# Altium PCB samll car.PcbDoc
Units mil, origin at the board's own origin, x right, y up, seen from the top; angles counter-clockwise.
Board outline 3015 x 2630 mil, 2 copper layers (Top Layer, Bottom Layer); 53 components, 36 nets, 232 pads, 1797 vias.
Unrouted connection lines stored in the file: 42.
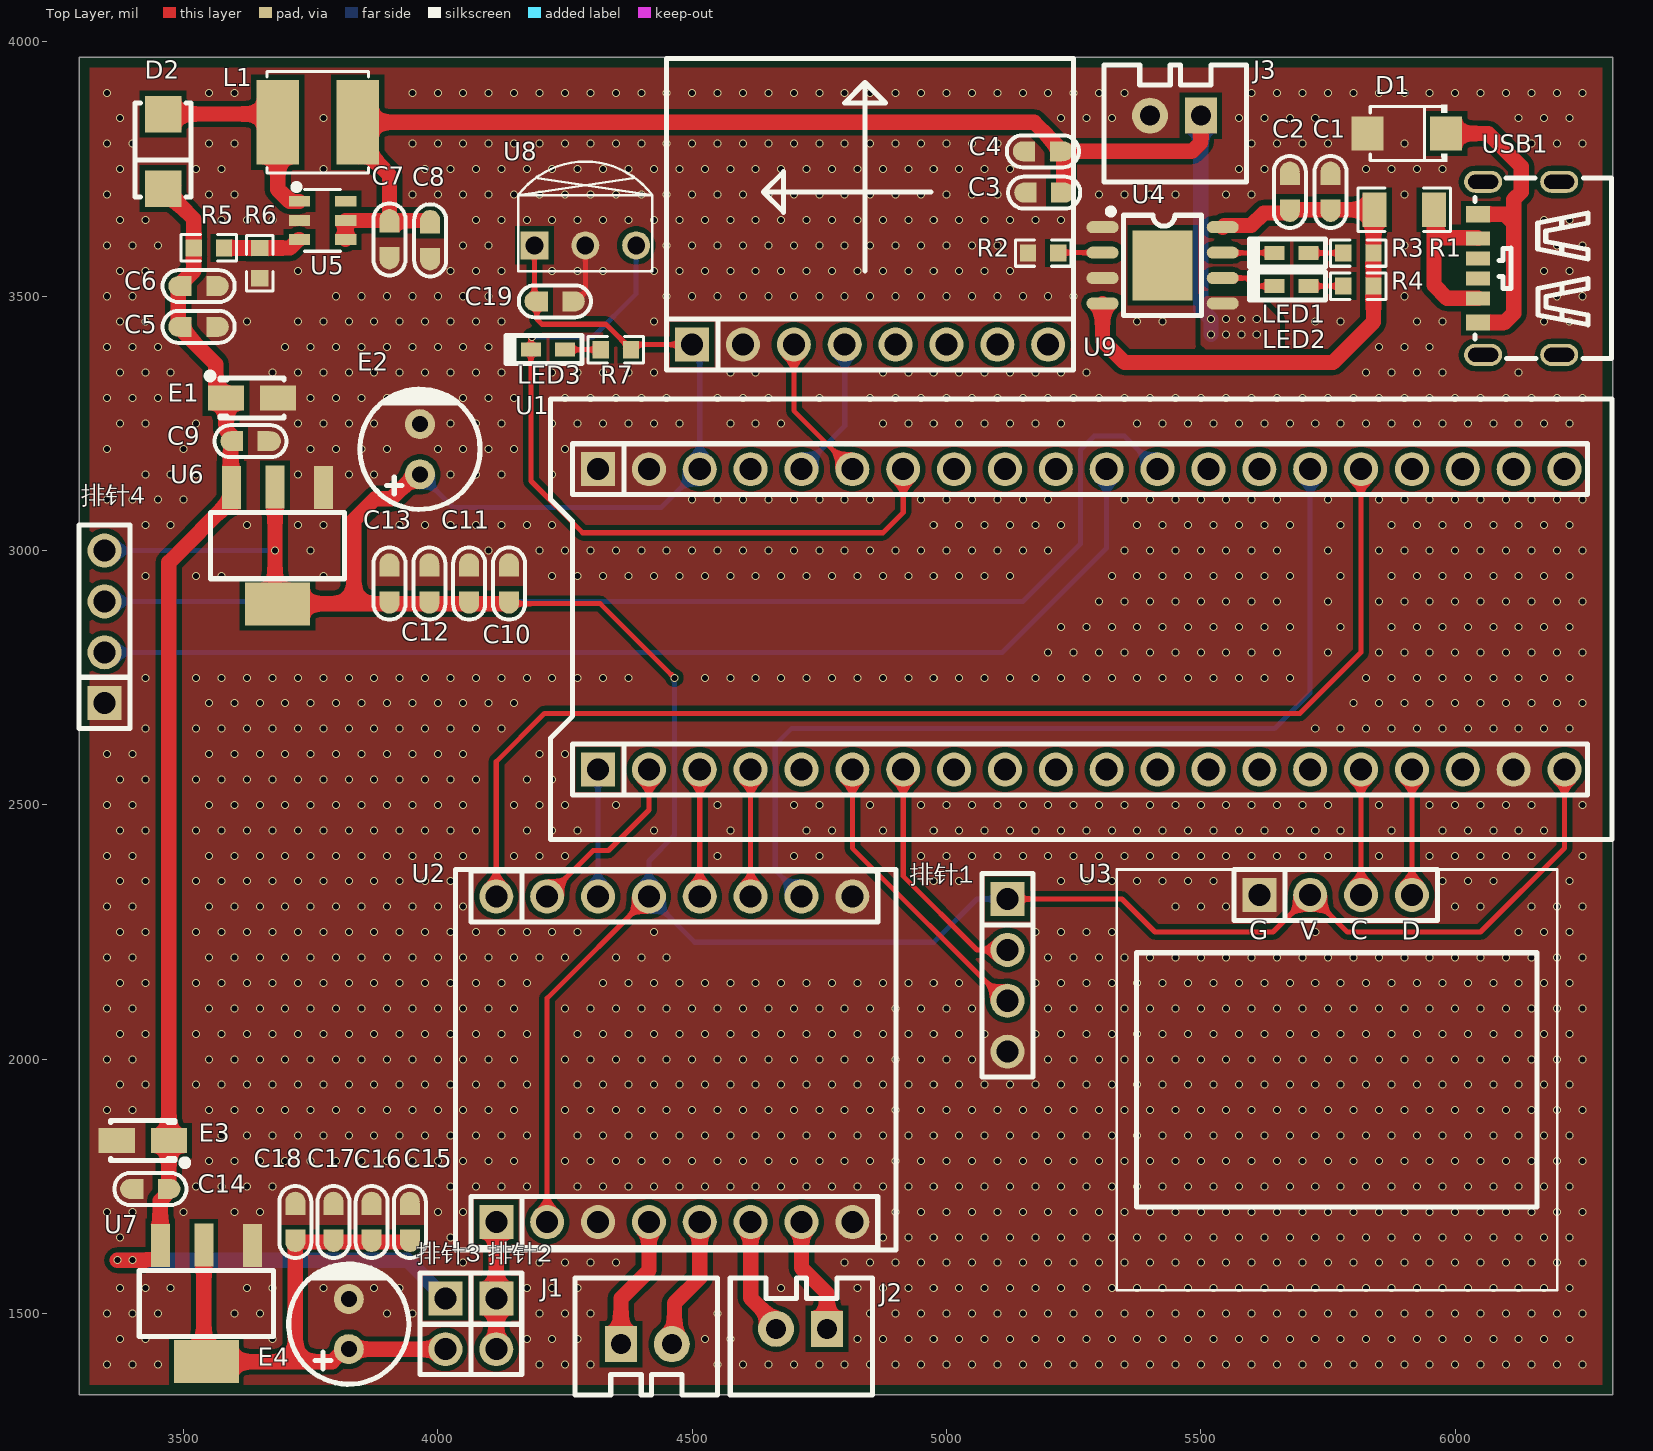
[diagram p0: Top Layer view]
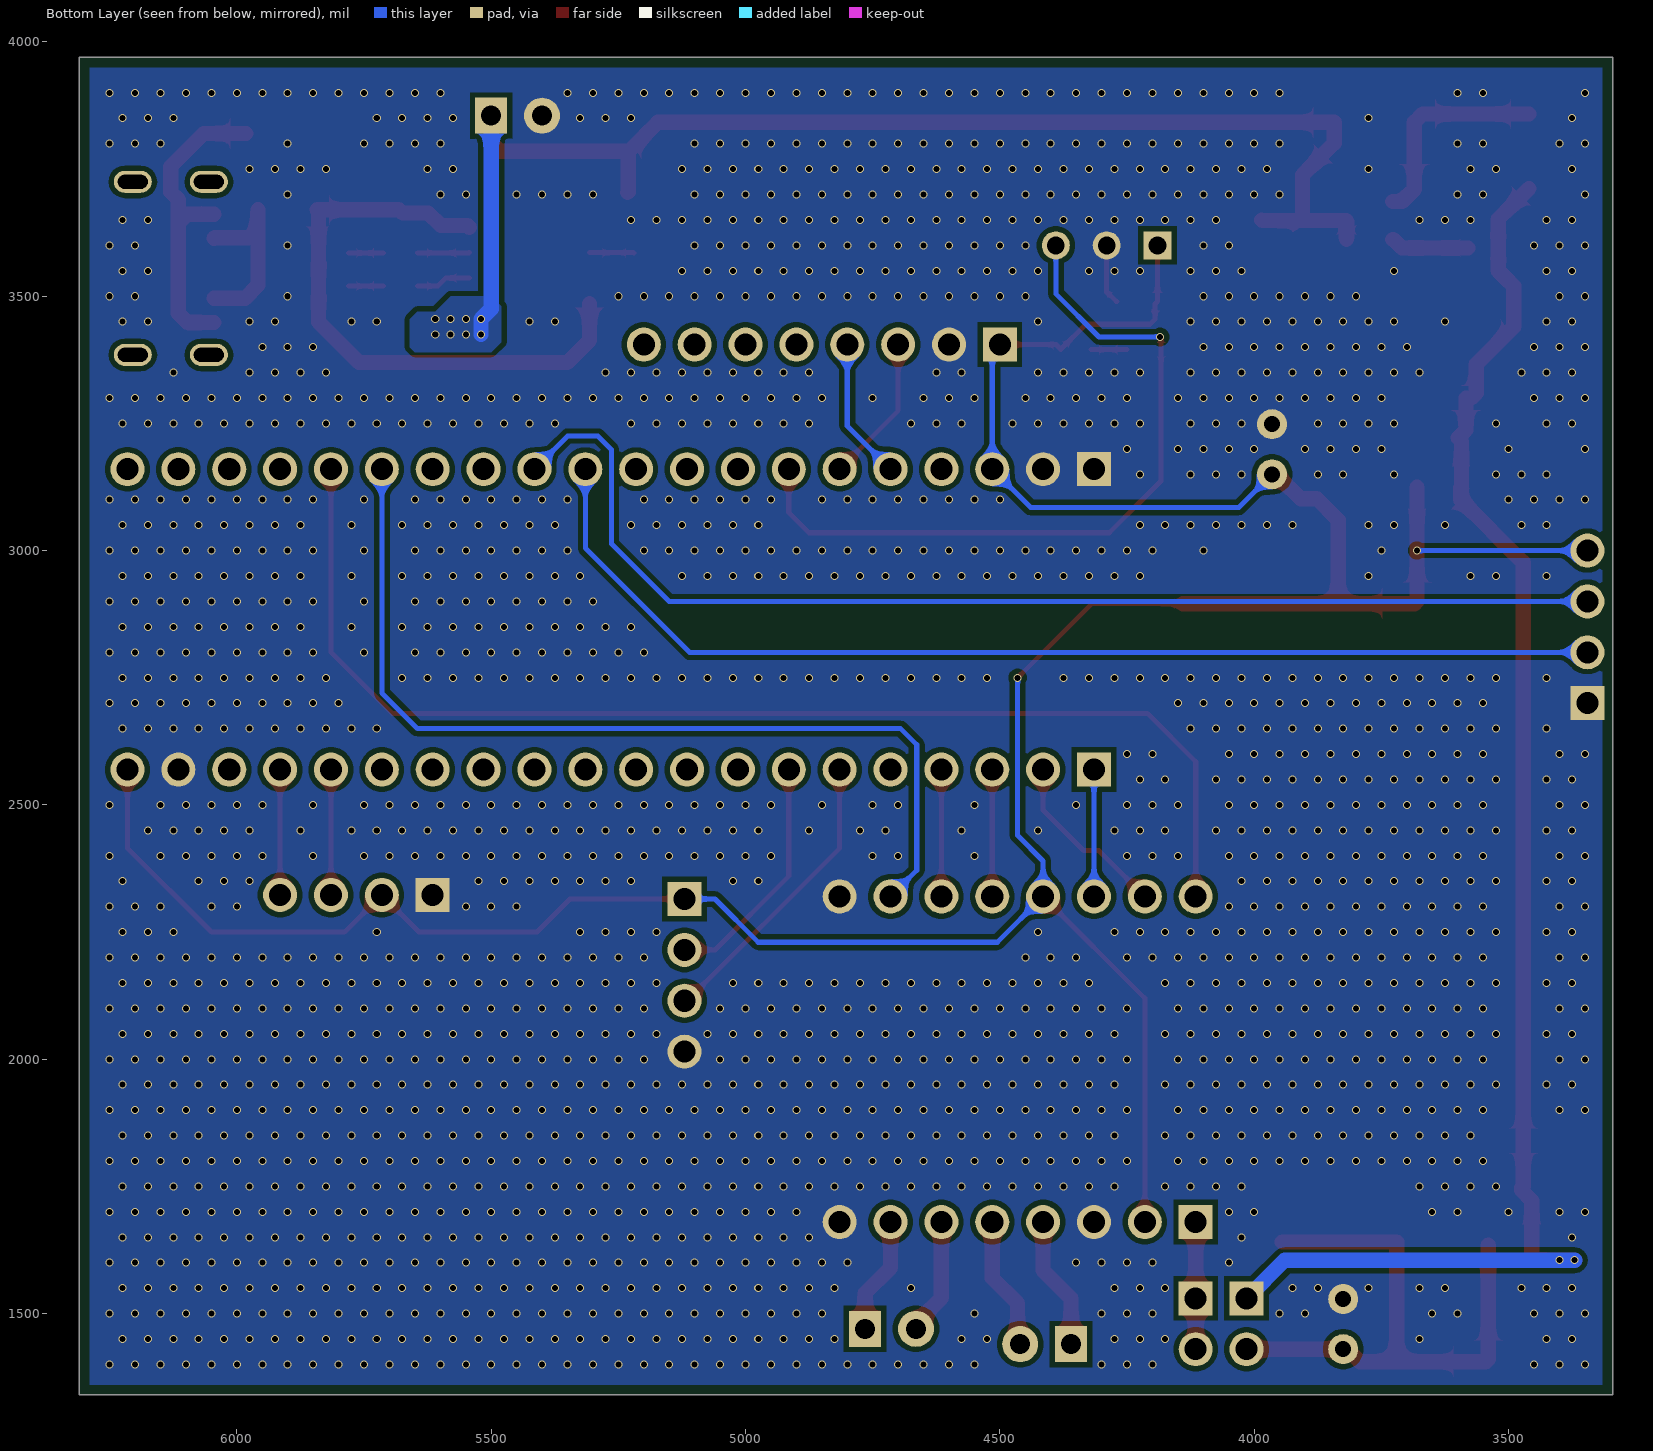
[diagram p1: Bottom Layer view, seen from below]
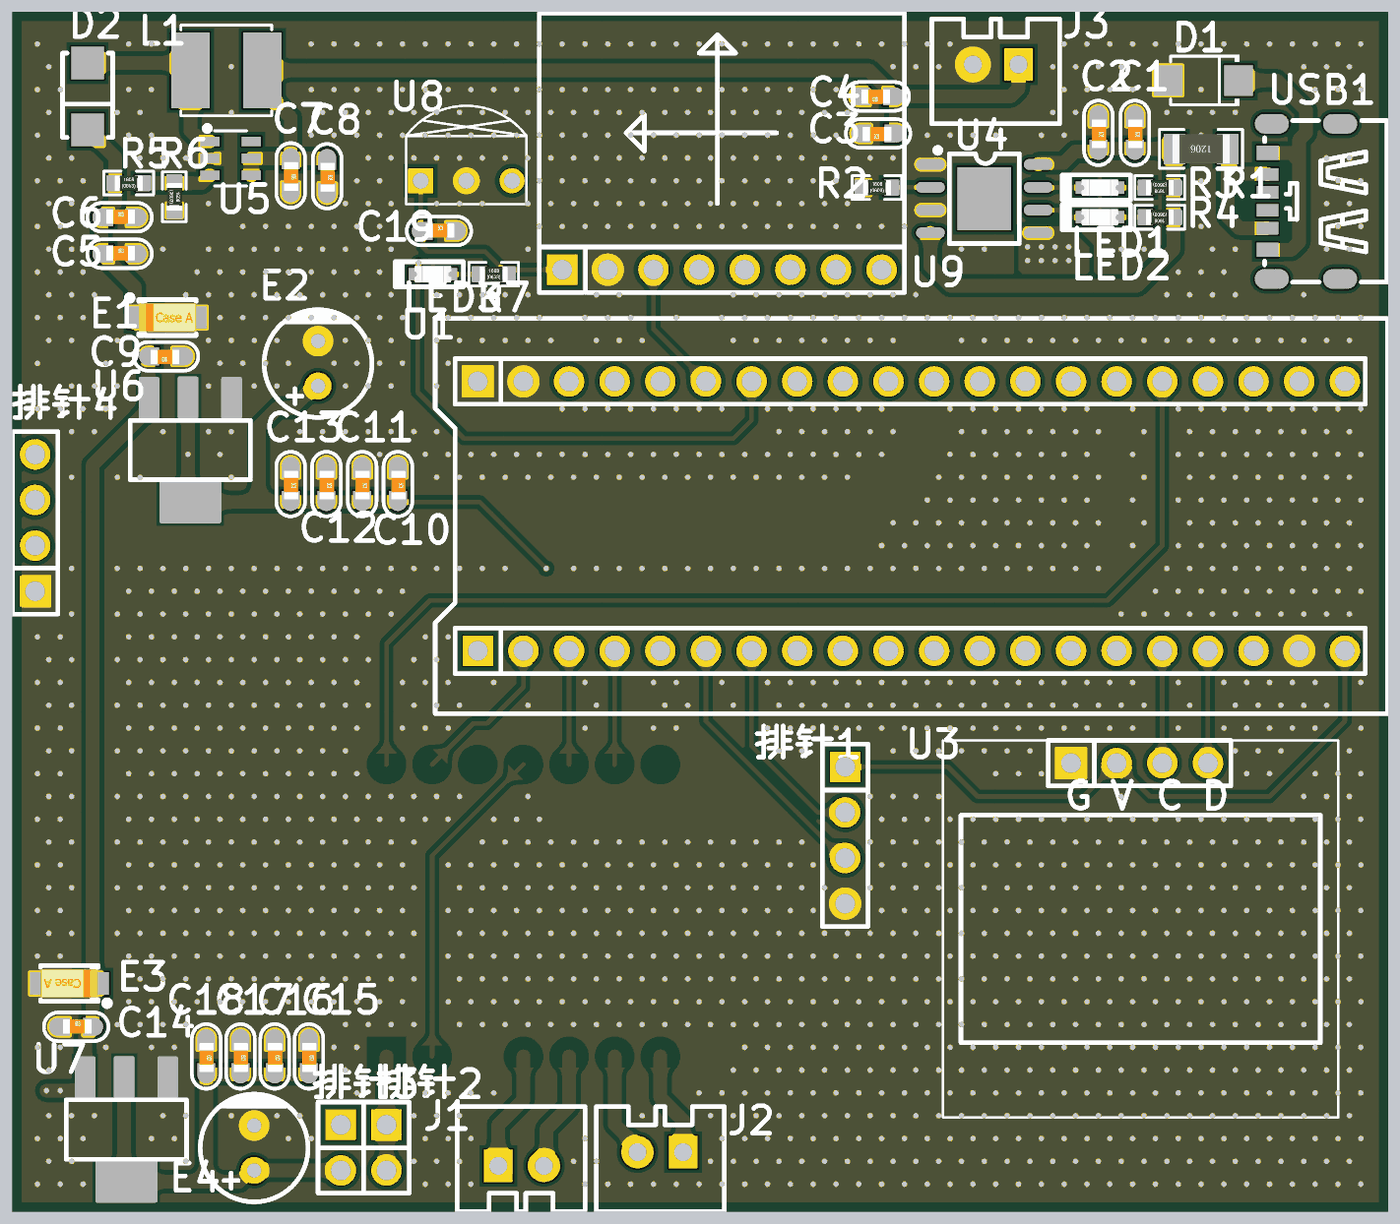
[diagram p2: 3D render of the assembled board from above, using the file's embedded part models]

## Layer stack, top to bottom
Top Solder: solder mask 0.4, Solder Resist, Dk 3.5
Top Layer: signal copper 1.4
Dielectric 1: dielectric 12.6, FR-4, Dk 4.8
Bottom Layer: signal copper 1.4
Bottom Solder: solder mask 0.4, Solder Resist, Dk 3.5

## Board outline
3295,1340 3295,3970 6310,3970 6310,2430 6310,1340

## Design rules (kind name [scope] priority, off if disabled: settings)
BoardOutlineClearance [All] p1: gap=10 ignorepadtopadclearanceinfootprint=FALSE except(0: Arc-SplitContinuation Track-SplitContinuation SMDPad-SplitContinuation THPad-SplitContinuation Via-SplitContinuation Fill-SplitContinuation Poly-SplitContinuation Region-SplitContinuation Text-SplitContinuation; 20: Poly-OutlineEdge)
Clearance [All] p1: gap=10 ignorepadtopadclearanceinfootprint=FALSE except(0: Arc-Hole Track-Hole SMDPad-Hole THPad-Hole Via-Hole Fill-Hole Poly-Hole Region-Hole Text-Hole)
HoleSize [All] p1: absolutevalues=TRUE maxlimit=1000 minlimit=1 maxpercent=80.000 minpercent=20.000
HoleToHoleClearance [All] p1: gap=5 allowstackedmicrovias=TRUE
MinimumSolderMaskSliver [All] p1: minsoldermaskwidth=5
PolygonConnect [All] p1: connectstyle=Direct reliefconductorwidth=10 reliefentries=4 polygonreliefangle="90 Angle" airgapwidth=10
RoutingVias [All] p1: holewidth=11.81 width=15.75 viastyle="Through Hole" minholewidth=10 minwidth=10 maxholewidth=10000 maxwidth=10000
SilkToSilkClearance [All] p1: silktosilkclearance=5
SilkToSolderMaskClearance [IsPad] p1: minsilkscreentomaskgap=5 clearancetoexposedcopper=TRUE
SolderMaskExpansion [All] p1: expansion=4 istentingtop=FALSE
Width [All] p1: maxlimit=1000 minlimit=1 preferedwidth=10 minimp=50.000000 maximp=50.000000 favimp=50.000000
25 further rules are at their usual default settings.

## Components (designator, comment, footprint, x,y, rotation, side; value= is the part's Value field where it differs from the comment)
C1 "10uF" C0603 5755,3705 r270 top
C2 "100nF" C0603 5675,3705 r270 top
C3 "10uF" C0603 5192.22,3703.75 r180 top
C4 "100nF" C0603 5189.37,3785 r180 top
C5 "100nF" C0603 3530,3440 r0 top
C6 "22uF" C0603 3530,3520 r0 top
C7 "22uF" C0603 3905,3611.77 r270 top
C8 "100nF" C0603 3985,3610 r270 top
C9 "10uF" C0603 3631.77,3215 r180 top
C10 "33pF" C0603 4140,2935 r270 top
C11 "10nF" C0603 4061.67,2935 r270 top
C12 "10uF" C0603 3983.33,2935 r270 top
C13 "10uF" C0603 3905,2935 r270 top
C14 "10uF" C0603 3435,1745 r0 top
C15 "33pF" C0603 3945,1680 r270 top
C16 "10nF" C0603 3870,1680 r270 top
C17 "10uF" C0603 3795,1680 r270 top
C18 "10uF" C0603 3720,1680 r270 top
C19 "100nF" C0603 4230,3490 r0 top
D1 "SS26F" SMAF 5905,3820 r180 top
D2 "SM340AF" SMA-FL-RD 3460,3785 r90 top
E1 "10uF" CAP-TANTALUM-A 3635,3300 r0 top value=10uF/16V
E2 "470uF/16V" CAP-TH_BD6.0-P2.50-D0.5-FD 3965,3199.82 r90 top value=10uF/16V
E3 "10uF" CAP-TANTALUM-A 3420,1840 r180 top value=10uF/16V
E4 "470uF/16V" CAP-TH_BD6.0-P2.50-D0.5-FD 3825,1479.82 r90 top value=10uF/16V
J1 "CON2" XH2.54-2PZZ 4360,1440 r0 top
J2 "CON2" XH2.54-2PZZ 4765,1470 r180 top
J3 "CON2" XH2.54-2PZZ 5500,3855 r180 top
L1 "22uH" IND-SMD_L5.0-W5.0 3835,3885 r180 top
LED1 "LED1" LED-0603 5678.46,3585 r180 top
LED2 "LED1" LED-0603 5678.46,3520 r180 top
LED3 "LED1" LED-0603 4216.54,3395 r180 top
R1 "0.25R" R1206 5900,3670 r180 top
R2 "2K" R0603 5190,3585 r0 top
R3 "2K" R0603 5809.65,3585 r180 top
R4 "10K" R0603 5809.65,3520 r180 top
R5 "15K" R0603 3550,3595 r0 top
R6 "2K" R0603 3650,3565 r270 top
R7 "4.7K" R0603 4350,3395 r0 top
U1 "STM32-C8T6" STM32-C8T6 5010,2334.45 r90 top
U2 "TB6612FNG" TB6612FNG 14815,11035 r90 top
U3 "0.96OLED" 0.96OLED 5765,2323.03 r0 top
U4 "TP4056-MS" SOP-8-TL-EP 5425,3565 r0 top
U5 "MT3608" SOT-23-6 3760,3640 r270 top
U6 "1117-3.3V" SOT-223 3685,3010 r180 top
U7 "1117-3.3V" SOT-223 3545,1520 r180 top
U8 "HX1838" VS/HX1838B 4290,3600 r270 top
U9 "MPU6050" MPU6050 4840,3530 r90 top
USB1 "TYPE-C 6P" TYPE-C-6P 6164.76,3554.92 r90 top
排针1 "4P 排针" XH2.54-1*4 5120,2165 r270 top
排针2 "2P 排针" XH2.54-1*2 4115,1480 r270 top
排针3 "2P 排针" XH2.54-1*2 4015,1480 r270 top
排针4 "4P 排针" XH2.54-1*4 3345,2850 r90 top

## Footprints (in the part's own frame and the unit in brackets; to place one, negate y for a bottom-side part, rotate by r counter-clockwise, add the part's x,y. Pads: shape width x height; smd on the part's side, far side on the other; paste and mask are expansions set on the pad)
0.96OLED [mm]
  rect 1.7x1.7 hole 1.1 paste-2539.97 mask+0.051: 1(-3.81,0)
  round 1.7 hole 1.1 paste-2539.97 mask+0.051: 2(-1.27,0) 3(1.27,0) 4(3.81,0)
  silkscreen extent -10.94,-19.73 11.06,1.27
C0603 [mm]
  round 1 smd: 1(-1.016,0) 2(1,0)
  rect 0.6x1 smd: 1(-0.65,0) 2(0.68,0)
  silkscreen extent -1.8,-0.8 1.8,0.8, body extent -0.74,-0.38 0.86,0.42, height 0.3
CAP-TANTALUM-A [mm] "Tantalum Capacitor Case A, SMD"
  rect 1.8x1.25 smd: 1(-1.3,0) 2(1.3,0)
  silkscreen extent -2.23,-1 1.6,1.23, body extent -1.6,-0.8 1.6,0.8, height 1.6
CAP-TH_BD6.0-P2.50-D0.5-FD [mm]
  round 1.5 hole 0.8: 1(-1.266,0) 2(1.235,0)
  silkscreen extent -3.01,-3 3.06,3, body extent -3.02,-3 2.98,3, height 7
IND-SMD_L5.0-W5.0 [mm]
  rect 2.124x4.22 smd: 1(3.802,1.092) 2(-0.197,1.092)
  silkscreen extent -0.72,-1.43 4.33,3.62
LED-0603 [mm] "LED, SMD, 0603"
  rect 1x0.7 smd: 1(-0.85,0) 2(0.85,0)
  silkscreen extent -1.7,-0.7 2.1,0.7, body extent -1.03,-0.46 1.03,0.45, height 0.85
MPU6050 [mm]
  rect 1.7x1.7 hole 1.1 paste-2539.97 mask+0.051: 1(-3.175,8.636)
  round 1.7 hole 1.1 paste-2539.97 mask+0.051: 2(-3.175,6.096) 3(-3.175,3.556) 4(-3.175,1.016) 5(-3.175,-1.524) 6(-3.175,-4.064) 7(-3.175,-6.604) 8(-3.175,-9.144)
  silkscreen extent -4.45,-10.41 11.12,9.91
R0603 [mil]
  rect 31.75x34.02 smd: 1(-29.65,0) 2(29.65,0)
  silkscreen extent -55,-26 55,26, body extent -31,-17 31,17, height 18
R1206 [mil]
  rect 47.54x66.97 smd: 1(-58.22,0) 2(58.22,0)
  silkscreen extent -91,-42 91,42, body extent -63,-31 63,31, height 24
SMA-FL-RD [mm]
  rect 1.82x1.82 smd: 1(-1.86,0) 2(1.86,0)
  silkscreen extent -2.29,-1.4 2.41,1.4
SMAF [mm]
  rect 1.6x1.7 smd: 1(1.96,0.001) 2(-1.96,0.001)
  silkscreen extent -2.01,-1.43 1.83,1.42
SOP-8-TL-EP [mm]
  oval 1.6x0.6 smd: 1(-3,1.798) 2(-3,0.528) 3(-3,-0.742) 4(-3,-2.012) 5(3,-2.012) 6(3,-0.742) 7(3,0.528) 8(3,1.798)
  rect 3x3.5 smd: 9(0,-0.107)
  silkscreen extent -2.74,-2.61 1.95,2.73
SOT-23-6 [mil]
  rect 20.95x42.2 smd paste+0: 1(-46.45,-31.85) 2(-9.05,-31.85) 3(28.36,-31.85) 4(28.36,58.63) 5(-9.05,58.63) 6(-46.45,58.63)
  silkscreen extent -81,-44 52,48
SOT-223 [mm]
  rect 0.95x2.15 smd paste+0.102 mask+0.102: 1(-2.3,-2.889) 2(0.127,-2.91) 3(2.3,-2.889)
  rect 3.25x2.15 smd paste+0.102 mask+0.102: 4(0,2.91)
  silkscreen extent -3.35,-1.64 3.35,1.66
STM32-C8T6 [mm]
  rect 1.7x1.7 hole 1.1 paste-2539.97 mask+0.051: 1(5.969,17.653) 40(20.969,17.653)
  round 1.7 hole 1.1 paste-2539.97 mask+0.051: 2(5.969,15.113) 3(5.969,12.573) 4(5.969,10.033) 5(5.969,7.493) 6(5.969,4.953) 7(5.969,2.413) 8(5.969,-0.127) 9(5.969,-2.667) 10(5.969,-5.207) 11(5.969,-7.747) 12(5.969,-10.287) 13(5.969,-12.827) 14(5.969,-15.367) 15(5.969,-17.907) 16(5.969,-20.447) 17(5.969,-22.987) 18(5.969,-25.527) 19(5.969,-28.067) 20(5.969,-30.607) 21(20.969,-30.607) 22(20.969,-28.067) 23(20.969,-25.527) 24(20.969,-22.987) 25(20.969,-20.447) 26(20.969,-17.907) 27(20.969,-15.367) 28(20.969,-12.827) 29(20.969,-10.287) 30(20.969,-7.747) 31(20.969,-5.207) 32(20.969,-2.667) 33(20.969,-0.127) 34(20.969,2.413) 35(20.969,4.953) 36(20.969,7.493) 37(20.969,10.033) 38(20.969,12.573) 39(20.969,15.113)
  silkscreen extent 2.47,-32.98 24.47,20.02
TB6612FNG [mm]
  rect 1.7x1.7 hole 1.1 paste-2539.97 mask+0.051: 1(-237.617,271.78)
  round 1.7 hole 1.1 paste-2539.97 mask+0.051: 2(-237.617,269.24) 3(-237.617,266.7) 4(-237.617,264.16) 5(-237.617,261.62) 6(-237.617,259.08) 7(-237.617,256.54) 8(-237.617,254) 9(-221.361,254) 10(-221.361,256.54) 11(-221.361,259.08) 12(-221.361,261.62) 13(-221.361,264.16) 14(-221.361,266.7) 15(-221.361,269.24) 16(-221.361,271.78)
  silkscreen extent -239.01,251.81 -220.01,273.81
TYPE-C-6P [mm]
  oval 1.1x1.9 hole 0.7 slot 1.5 at 90 deg: 7(-4.32,-1.012) 7(-4.32,2.788) 7(4.32,-1.012) 7(4.32,2.788)
  rect 0.7x1.2 smd: A5(-0.5,3.038) A9(1.5,3.038) B5(0.5,3.038) B9(-1.5,3.038)
  rect 0.8x1.2 smd: A12(2.7,3.038) B12(-2.7,3.038)
  silkscreen extent -4.5,-3.61 4.5,3.19
VS/HX1838B [mil]
  rect 55x55 hole 35 paste-99999 mask+2: 1(0,-100)
  round 55 hole 35 paste-99999 mask+2: 2(0,0) 3(0,100)
  silkscreen extent -165,-132 51,132
XH2.54-1*2 [mm]
  rect 1.7x1.7 hole 1.1 paste-2539.97 mask+0.051: 1(-1.27,0)
  round 1.7 hole 1.1 paste-2539.97 mask+0.051: 2(1.27,0)
  silkscreen extent -2.54,-1.27 2.54,1.27
XH2.54-1*4 [mm]
  rect 1.7x1.7 hole 1.1 paste-2539.97 mask+0.051: 1(-3.81,0)
  round 1.7 hole 1.1 paste-2539.97 mask+0.051: 2(-1.27,0) 3(1.27,0) 4(3.81,0)
  silkscreen extent -5.08,-1.27 5.08,1.27
XH2.54-2PZZ [mm] "XH"
  rect 1.6x1.8 hole 1: 1(0,0)
  round 1.8 hole 1: 2(2.54,0)
  silkscreen extent -2.29,-2.54 4.83,3.3, body extent -2.29,-2.54 4.83,3.3, height 7

## Part data
C1 C2 C3 C4 C5 C6 C7 C8 C9 C10 C11 C12 C13 C14 C15 C16 C17 C18 C19: library part CAP, "Capacitor"
D1: library part 1N4007, "Diode"
D2: library part F1M
E1 E2 E3 E4: library part CAP-TANTALUM, "Tantalum Capacitor"
J1 J2 J3: "Connector"
L1: library part "Inductor Iron", "Magnetic-Core Inductor", LatestRevisionDate=17-Jul-2002, LatestRevisionNote="Re-released for DXP Platform.", PackageReference=AXIAL-0.9, Published=24-Mar-1999, Publisher="Altium Limited"
LED1 LED2 LED3: "单色发光二极管"
R1 R2 R3 R4 R5 R6 R7: library part RES, "Resistor"
U6 U7: library part 1117, "Linear Regulator"
排针1 排针2 排针3 排针4: JLCPCB Part Class=扩展库, Add into BOM=yes, Convert to PCB=yes, Device="2P 排针", Supplier Footprint=插件, Supplier Part=C124375, Symbol="2P 排针"

## Via types
v1: diameter 15.75, hole 11.81, Top Layer to Bottom Layer, tented both sides, 1796 vias
v2: diameter 15.75, hole 11.81, Top Layer to Bottom Layer, 1 vias

## Nets (pads, with @x,y where several pads share a name; then routed paths per layer and width w, separated by ;. In a path a pad name is that pad's centre, name@x,y a point inside that pad or via, vN(x,y) a via of type N, cw(c..) or ccw(c..) an arc to the next point about the centre after c; other vN are vias at no path point)
3V3: C10.2 C11.2 C12.2 C13.2 C19.1 E2.1 R7.2 U1.20 U1.38 U2.2 U2.13 U3.2 U6.2 U6.4 U8.1 U9.1 排针1.1 排针4.4 | length 6435.6
  Top Layer w10: C10.2@4140,2895.63 4319.37,2895.63 v1(4465,2750) ; U8.1 4190,3490 4194.69,3485.31 4194.69,3455.31 4205,3445 4330.79,3445 4379.65,3396.13 R7.2 4389.65,3405 U9.1 ; U2.2 4215,2120 U2.13 ; 排针1.1 5345,2315 5410,2250 5641.97,2250 U3.2 5788.03,2250 6050,2250 6215,2415 U1.20
  Top Layer w30: U6.2 3680,2900.41 U6.4 3685.11,2895.52 3835,2895.52 ; E2.1 3957.14,3150 3909.15,3102.01 3877.01,3102.01 3835,3060 3835,2895.52 ; C10.2@4140,2895.63 4139.89,2895.52 3835,2895.52
  Bottom Layer w10: 排针4.4 v1(3680,3000) ; E2.1 4030,3085 4440,3085 U1.38 4515,3390 U9.1 ; v1(4465,2750) 4465,2440 4415,2390 U2.13 4505,2230 4975,2230 5060,2315 排针1.1
6050_SCL: U1.35 U9.3 | length 292.6
  Top Layer w10: U9.3 4700,3275 U1.35
6050_SDA: U1.36 U9.4 | length 280.2
  Bottom Layer w10: U1.36 4800,3245 U9.4
+3.3: C15.2 C16.2 C17.2 C18.2 E4.1 U7.2 U7.4 排针3.2 | length 1171.6
  Top Layer w30: U7.2 3540,1410.41 U7.4 3720,1405.41 ; C15.2@3945,1640.63 3870,1640.63 3795,1640.63 3720,1640.63 3720,1405.41 ; 排针3.2 E4.1 3817.14,1430 3792.55,1405.41 3720,1405.41
AIN1: U1.1 U2.14 | length 249.4
  Bottom Layer w10: U2.14 U1.1
AIN2: U1.2 U2.15 | length 349.9
  Top Layer w10: U2.15 4305.45,2410.45 4335.45,2410.45 4415,2490 U1.2
BIN1: U1.3 U2.12 | length 249.4
  Top Layer w10: U2.12 U1.3
BIN2: U1.4 U2.11 | length 249.4
  Top Layer w10: U2.11 U1.4
Echo: U1.30 排针4.2 | length 2209.9
  Bottom Layer w10: 排针4.2 5110,2800 5315,3005 U1.30
GND: C1.1 C2.1 C3.2 C4.2 C5.2 C6.2 C7.2 C8.2 C9.1 C10.1 C11.1 C12.1 C13.1 C14.1 C15.1 C16.1 C17.1 C18.1 C19.2 D1.1 E1.2 E2.2 E3.2 E4.2 J3.2 R2.1 R6.2 U1.19 U1.39 U1.40 U2.3 U2.8 U2.9 U3.1 U4.1 U4.3 U5.2 U6.1 U7.1 U8.2 U9.2 排针1.4 排针4.1 | length 119.7
  Top Layer w10: C19.2@4269.37,3490 4271.42,3490 4290,3508.58 U8.2
  other v1: 3350,1400 3400,1400 3450,1400 4200,1400 4250,1400 4300,1400 4550,1400 4600,1400 4650,1400 4700,1400 4750,1400 4800,1400 4850,1400 4900,1400 4950,1400 5000,1400 5050,1400 5100,1400 5150,1400 5200,1400 5250,1400 5300,1400 5350,1400 5400,1400 5450,1400 5500,1400 5550,1400 5600,1400 5650,1400 5700,1400 5750,1400 5800,1400 5850,1400 5900,1400 5950,1400 6000,1400 6050,1400 6100,1400 6150,1400 6200,1400 6250,1400 3375,1450 3425,1450 3675,1450 4175,1450 4225,1450 4275,1450 4525,1450 4575,1450 4825,1450 4875,1450 4925,1450 4975,1450 5025,1450 5075,1450 5125,1450 5175,1450 5225,1450 5275,1450 5325,1450 5375,1450 5425,1450 5475,1450 5525,1450 5575,1450 5625,1450 5675,1450 5725,1450 5775,1450 5825,1450 5875,1450 5925,1450 5975,1450 6025,1450 6075,1450 6125,1450 6175,1450 6225,1450 3350,1500 3400,1500 3450,1500 3600,1500 3650,1500 3900,1500 3950,1500 4200,1500 4250,1500 4300,1500 4550,1500 4850,1500 4900,1500 4950,1500 5000,1500 5050,1500 5100,1500 5150,1500 5200,1500 5250,1500 5300,1500 5350,1500 5400,1500 5450,1500 5500,1500 5550,1500 5600,1500 5650,1500 5700,1500 5750,1500 5800,1500 5850,1500 5900,1500 5950,1500 6000,1500 6050,1500 6100,1500 6150,1500 6200,1500 6250,1500 3375,1550 3425,1550 3475,1550 3625,1550 3675,1550 3775,1550 3875,1550 3925,1550 4175,1550 4225,1550 4275,1550 4675,1550 4825,1550 4875,1550 4925,1550 4975,1550 5025,1550 5075,1550 5125,1550 5175,1550 5225,1550 5275,1550 5325,1550 5375,1550 5425,1550 5475,1550 5525,1550 5575,1550 5625,1550 5675,1550 5725,1550 5775,1550 5825,1550 5875,1550 5925,1550 5975,1550 6025,1550 6075,1550 6125,1550 6175,1550 6225,1550 4050,1600 4200,1600 4250,1600 4300,1600 4350,1600 4800,1600 4850,1600 4900,1600 4950,1600 5000,1600 5050,1600 5100,1600 5150,1600 5200,1600 5250,1600 5300,1600 5350,1600 5400,1600 5450,1600 5500,1600 5550,1600 5600,1600 5650,1600 5700,1600 5750,1600 5800,1600 5850,1600 5900,1600 5950,1600 6000,1600 6050,1600 6100,1600 6150,1600 6200,1600 6250,1600 3375,1650 4025,1650 4875,1650 4925,1650 4975,1650 5025,1650 5075,1650 5125,1650 5175,1650 5225,1650 5275,1650 5325,1650 5375,1650 5425,1650 5475,1650 5525,1650 5575,1650 5625,1650 5675,1650 5725,1650 5775,1650 5825,1650 5875,1650 5925,1650 5975,1650 6025,1650 6075,1650 6125,1650 6175,1650 6225,1650 3350,1700 3400,1700 3500,1700 3600,1700 3650,1700 4000,1700 4050,1700 4900,1700 4950,1700 5000,1700 5050,1700 5100,1700 5150,1700 5200,1700 5250,1700 5300,1700 5350,1700 5400,1700 5450,1700 5500,1700 5550,1700 5600,1700 5650,1700 5700,1700 5750,1700 5800,1700 5850,1700 5900,1700 5950,1700 6000,1700 6050,1700 6100,1700 6150,1700 6200,1700 6250,1700 3525,1750 3575,1750 3625,1750 3675,1750 4025,1750 4075,1750 4125,1750 4175,1750 4275,1750 4325,1750 4375,1750 4425,1750 4475,1750 4525,1750 4575,1750 4625,1750 4675,1750 4725,1750 4775,1750 4825,1750 4875,1750 4925,1750 4975,1750 5025,1750 5075,1750 5125,1750 5175,1750 5225,1750 5275,1750 5325,1750 5375,1750 5425,1750 5475,1750 5525,1750 5575,1750 5625,1750 5675,1750 5725,1750 5775,1750 5825,1750 5875,1750 5925,1750 5975,1750 6025,1750 6075,1750 6125,1750 6175,1750 6225,1750 3550,1800 3600,1800 3650,1800 3700,1800 3750,1800 3800,1800 3850,1800 3900,1800 3950,1800 4000,1800 4050,1800 4100,1800 4150,1800 4250,1800 4300,1800 4350,1800 4400,1800 4450,1800 4500,1800 4550,1800 4600,1800 4650,1800 4700,1800 4750,1800 4800,1800 4850,1800 4900,1800 4950,1800 5000,1800 5050,1800 5100,1800 5150,1800 5200,1800 5250,1800 5300,1800 5350,1800 5400,1800 5450,1800 5500,1800 5550,1800 5600,1800 5650,1800 5700,1800 5750,1800 5800,1800 5850,1800 5900,1800 5950,1800 6000,1800 6050,1800 6100,1800 6150,1800 6200,1800 6250,1800 3575,1850 3625,1850 3675,1850 3725,1850 3775,1850 3825,1850 3875,1850 3925,1850 3975,1850 4025,1850 4075,1850 4125,1850 4175,1850 4275,1850 4325,1850 4375,1850 4425,1850 4475,1850 4525,1850 4575,1850 4625,1850 4675,1850 4725,1850 4775,1850 4825,1850 4875,1850 4925,1850 4975,1850 5025,1850 5075,1850 5125,1850 5175,1850 5225,1850 5275,1850 5325,1850 5375,1850 5425,1850 5475,1850 5525,1850 5575,1850 5625,1850 5675,1850 5725,1850 5775,1850 5825,1850 5875,1850 5925,1850 5975,1850 6025,1850 6075,1850 6125,1850 6175,1850 6225,1850 3350,1900 3400,1900 3550,1900 3600,1900 3650,1900 3700,1900 3750,1900 3800,1900 3850,1900 3900,1900 3950,1900 4000,1900 4050,1900 4100,1900 4150,1900 4250,1900 4300,1900 4350,1900 4400,1900 4450,1900 4500,1900 4550,1900 4600,1900 4650,1900 4700,1900 4750,1900 4800,1900 4850,1900 4900,1900 4950,1900 5000,1900 5050,1900 5100,1900 5150,1900 5200,1900 5250,1900 5300,1900 5350,1900 5400,1900 5450,1900 5500,1900 5550,1900 5600,1900 5650,1900 5700,1900 5750,1900 5800,1900 5850,1900 5900,1900 5950,1900 6000,1900 6050,1900 6100,1900 6150,1900 6200,1900 6250,1900 3375,1950 3425,1950 3525,1950 3575,1950 3625,1950 3675,1950 3725,1950 3775,1950 3825,1950 3875,1950 3925,1950 3975,1950 4025,1950 4075,1950 4125,1950 4175,1950 4275,1950 4325,1950 4375,1950 4425,1950 4475,1950 4525,1950 4575,1950 4625,1950 4675,1950 4725,1950 4775,1950 4825,1950 4875,1950 4925,1950 4975,1950 5025,1950 5075,1950 5125,1950 5175,1950 5225,1950 5275,1950 5325,1950 5375,1950 5425,1950 5475,1950 5525,1950 5575,1950 5625,1950 5675,1950 5725,1950 5775,1950 5825,1950 5875,1950 5925,1950 5975,1950 6025,1950 6075,1950 6125,1950 6175,1950 6225,1950 3350,2000 3400,2000 3550,2000 3600,2000 3650,2000 3700,2000 3750,2000 3800,2000 3850,2000 3900,2000 3950,2000 4000,2000 4050,2000 4100,2000 4150,2000 4250,2000 4300,2000 4350,2000 4400,2000 4450,2000 4500,2000 4550,2000 4600,2000 4650,2000 4700,2000 4750,2000 4800,2000 4850,2000 4900,2000 4950,2000 5000,2000 5050,2000 5200,2000 5250,2000 5300,2000 5350,2000 5400,2000 5450,2000 5500,2000 5550,2000 5600,2000 5650,2000 5700,2000 5750,2000 5800,2000 5850,2000 5900,2000 5950,2000 6000,2000 6050,2000 6100,2000 6150,2000 6200,2000 6250,2000 3375,2050 3425,2050 3525,2050 3575,2050 3625,2050 3675,2050 3725,2050 3775,2050 3825,2050 3875,2050 3925,2050 3975,2050 4025,2050 4075,2050 4125,2050 4175,2050 4275,2050 4325,2050 4375,2050 4425,2050 4475,2050 4525,2050 4575,2050 4625,2050 4675,2050 4725,2050 4775,2050 4825,2050 4875,2050 4925,2050 4975,2050 5025,2050 5075,2050 5175,2050 5225,2050 5275,2050 5325,2050 5375,2050 5425,2050 5475,2050 5525,2050 5575,2050 5625,2050 5675,2050 5725,2050 5775,2050 5825,2050 5875,2050 5925,2050 5975,2050 6025,2050 6075,2050 6125,2050 6175,2050 6225,2050 3350,2100 3400,2100 3550,2100 3600,2100 3650,2100 3700,2100 3750,2100 3800,2100 3850,2100 3900,2100 3950,2100 4000,2100 4050,2100 4100,2100 4150,2100 4250,2100 4300,2100 4350,2100 4400,2100 4450,2100 4500,2100 4550,2100 4600,2100 4650,2100 4700,2100 4750,2100 4800,2100 4850,2100 4900,2100 4950,2100 5000,2100 5050,2100 5200,2100 5250,2100 5300,2100 5350,2100 5400,2100 5450,2100 5500,2100 5550,2100 5600,2100 5650,2100 5700,2100 5750,2100 5800,2100 5850,2100 5900,2100 5950,2100 6000,2100 6050,2100 6100,2100 6150,2100 6200,2100 6250,2100 3375,2150 3425,2150 3525,2150 3575,2150 3625,2150 3675,2150 3725,2150 3775,2150 3825,2150 3875,2150 3925,2150 3975,2150 4025,2150 4075,2150 4125,2150 4175,2150 4325,2150 4375,2150 4425,2150 4475,2150 4525,2150 4575,2150 4625,2150 4675,2150 4725,2150 4775,2150 4825,2150 4875,2150 4925,2150 4975,2150 5025,2150 5175,2150 5225,2150 5275,2150 5325,2150 5375,2150 5425,2150 5475,2150 5525,2150 5575,2150 5625,2150 5675,2150 5725,2150 5775,2150 5825,2150 5875,2150 5925,2150 5975,2150 6025,2150 6075,2150 6125,2150 6175,2150 6225,2150 3350,2200 3400,2200 3550,2200 3600,2200 3650,2200 3700,2200 3750,2200 3800,2200 3850,2200 3900,2200 3950,2200 4000,2200 4050,2200 4100,2200 4150,2200 4200,2200 4250,2200 4350,2200 4400,2200 4450,2200 5200,2200 5250,2200 5300,2200 5350,2200 5400,2200 5450,2200 5500,2200 5550,2200 5600,2200 5650,2200 5700,2200 5750,2200 5800,2200 5850,2200 5900,2200 5950,2200 6000,2200 6050,2200 6100,2200 6150,2200 6200,2200 6250,2200 3375,2250 3425,2250 3525,2250 3575,2250 3625,2250 3675,2250 3725,2250 3775,2250 3825,2250 3875,2250 3925,2250 3975,2250 4025,2250 4075,2250 4125,2250 4175,2250 4225,2250 4275,2250 4425,2250 5175,2250 5225,2250 5275,2250 5325,2250 5725,2250 6125,2250 6175,2250 6225,2250 3350,2300 3400,2300 3550,2300 3600,2300 3650,2300 3700,2300 3750,2300 3800,2300 3850,2300 3900,2300 3950,2300 4000,2300 4050,2300 5450,2300 5500,2300 5550,2300 6000,2300 6050,2300 6150,2300 6200,2300 6250,2300 3375,2350 3425,2350 3525,2350 3575,2350 3625,2350 3675,2350 3725,2350 3775,2350 3825,2350 3875,2350 3925,2350 3975,2350 4025,2350 4975,2350 5025,2350 5225,2350 5275,2350 5325,2350 5375,2350 5425,2350 5475,2350 5525,2350 5975,2350 6025,2350 6075,2350 6225,2350 3350,2400 3400,2400 3550,2400 3600,2400 3650,2400 3700,2400 3750,2400 3800,2400 3850,2400 3900,2400 3950,2400 4000,2400 4050,2400 4150,2400 4200,2400 4250,2400 4550,2400 4700,2400 4750,2400 4950,2400 5000,2400 5050,2400 5100,2400 5150,2400 5200,2400 5250,2400 5300,2400 5350,2400 5400,2400 5450,2400 5500,2400 5550,2400 5600,2400 5650,2400 5700,2400 5750,2400 5850,2400 5950,2400 6000,2400 6050,2400 6100,2400 6150,2400 6250,2400 3375,2450 3425,2450 3525,2450 3575,2450 3625,2450 3675,2450 3725,2450 3775,2450 3825,2450 3875,2450 3925,2450 3975,2450 4025,2450 4075,2450 4175,2450 4225,2450 4275,2450 4425,2450 4575,2450 4725,2450 4775,2450 4875,2450 4975,2450 5025,2450 5075,2450 5125,2450 5175,2450 5225,2450 5275,2450 5325,2450 5375,2450 5425,2450 5475,2450 5525,2450 5575,2450 5625,2450 5675,2450 5725,2450 5775,2450 5875,2450 5975,2450 6025,2450 6075,2450 6125,2450 6175,2450 3350,2500 3400,2500 3550,2500 3600,2500 3650,2500 3700,2500 3750,2500 3800,2500 3850,2500 3900,2500 3950,2500 4000,2500 4050,2500 4150,2500 4200,2500 4250,2500 4350,2500 4550,2500 4700,2500 4750,2500 4850,2500 4950,2500 5000,2500 5050,2500 5100,2500 5150,2500 5200,2500 5250,2500 5300,2500 5350,2500 5400,2500 5450,2500 5500,2500 5550,2500 5600,2500 5650,2500 5700,2500 5750,2500 5850,2500 5950,2500 6000,2500 6050,2500 6100,2500 6150,2500 6250,2500 3375,2550 3425,2550 3525,2550 3575,2550 3625,2550 3675,2550 3725,2550 3775,2550 3825,2550 3875,2550 3925,2550 3975,2550 4025,2550 4075,2550 4175,2550 4225,2550 3350,2600 3400,2600 3550,2600 3600,2600 3650,2600 3700,2600 3750,2600 3800,2600 3850,2600 3900,2600 3950,2600 4000,2600 4050,2600 4200,2600 4250,2600 3425,2650 3525,2650 3575,2650 3625,2650 3675,2650 3725,2650 3775,2650 3825,2650 3875,2650 3925,2650 3975,2650 4025,2650 4075,2650 4125,2650 5725,2650 5775,2650 5825,2650 5875,2650 5925,2650 5975,2650 6025,2650 6075,2650 6125,2650 6175,2650 6225,2650 3550,2700 3600,2700 3650,2700 3700,2700 3750,2700 3800,2700 3850,2700 3900,2700 3950,2700 4000,2700 4050,2700 4100,2700 4150,2700 5800,2700 5850,2700 5900,2700 5950,2700 6000,2700 6050,2700 6100,2700 6150,2700 6200,2700 6250,2700 3425,2750 3525,2750 3575,2750 3625,2750 3675,2750 3725,2750 3775,2750 3825,2750 3875,2750 3925,2750 3975,2750 4025,2750 4075,2750 4125,2750 4175,2750 4225,2750 4275,2750 4325,2750 4375,2750 4525,2750 4575,2750 4625,2750 4675,2750 4725,2750 4775,2750 4825,2750 4875,2750 4925,2750 4975,2750 5025,2750 5075,2750 5125,2750 5175,2750 5225,2750 5275,2750 5325,2750 5375,2750 5425,2750 5475,2750 5525,2750 5575,2750 5625,2750 5675,2750 5825,2750 5875,2750 5925,2750 5975,2750 6025,2750 6075,2750 6125,2750 6175,2750 6225,2750 5200,2800 5250,2800 5300,2800 5350,2800 5400,2800 5450,2800 5500,2800 5550,2800 5600,2800 5650,2800 5750,2800 5850,2800 5900,2800 5950,2800 6000,2800 6050,2800 6100,2800 6150,2800 6200,2800 6250,2800 5225,2850 5275,2850 5325,2850 5375,2850 5425,2850 5475,2850 5525,2850 5575,2850 5625,2850 5675,2850 5775,2850 5875,2850 5925,2850 5975,2850 6025,2850 6075,2850 6125,2850 6175,2850 6225,2850 5300,2900 5350,2900 5400,2900 5450,2900 5500,2900 5550,2900 5600,2900 5650,2900 5750,2900 5850,2900 5900,2900 5950,2900 6000,2900 6050,2900 6100,2900 6150,2900 6200,2900 6250,2900 3425,2950 3525,2950 3575,2950 3775,2950 4225,2950 4275,2950 4325,2950 4375,2950 4425,2950 4475,2950 4525,2950 4575,2950 4625,2950 4675,2950 4725,2950 4775,2950 4825,2950 4875,2950 4925,2950 4975,2950 5025,2950 5075,2950 5125,2950 5325,2950 5375,2950 5425,2950 5475,2950 5525,2950 5575,2950 5625,2950 5675,2950 5775,2950 5875,2950 5925,2950 5975,2950 6025,2950 6075,2950 6125,2950 6175,2950 6225,2950 3750,3000 4100,3000 4200,3000 4250,3000 4300,3000 4350,3000 4400,3000 4450,3000 4500,3000 4550,3000 4600,3000 4650,3000 4700,3000 4750,3000 4800,3000 4850,3000 4900,3000 4950,3000 5000,3000 5050,3000 5100,3000 5150,3000 5200,3000 5350,3000 5400,3000 5450,3000 5500,3000 5550,3000 5600,3000 5650,3000 5750,3000 5850,3000 5900,3000 5950,3000 6000,3000 6050,3000 6100,3000 6150,3000 6200,3000 6250,3000 3425,3050 3475,3050 3625,3050 3725,3050 3775,3050 3925,3050 3975,3050 4025,3050 4075,3050 4125,3050 4175,3050 4225,3050 4975,3050 5025,3050 5075,3050 5125,3050 5175,3050 5225,3050 5375,3050 5425,3050 5475,3050 5525,3050 5575,3050 5625,3050 5675,3050 5775,3050 5875,3050 5925,3050 5975,3050 6025,3050 6075,3050 6125,3050 6175,3050 6225,3050 3350,3100 3400,3100 3450,3100 3500,3100 4500,3100 4550,3100 4600,3100 4650,3100 4700,3100 4750,3100 4800,3100 4850,3100 4950,3100 5000,3100 5050,3100 5100,3100 5150,3100 5200,3100 5350,3100 5400,3100 5450,3100 5500,3100 5550,3100 5600,3100 5650,3100 5750,3100 5850,3100 5900,3100 5950,3100 6000,3100 6050,3100 6100,3100 6150,3100 6200,3100 6250,3100 3425,3150 3475,3150 3525,3150 3725,3150 3825,3150 3875,3150 4025,3150 4075,3150 4125,3150 4225,3150 3350,3200 3500,3200 3750,3200 3800,3200 3850,3200 3900,3200 4000,3200 4050,3200 4100,3200 4150,3200 4250,3200 3375,3250 3425,3250 3525,3250 3725,3250 3775,3250 3825,3250 3875,3250 4025,3250 4075,3250 4125,3250 4225,3250 4275,3250 4325,3250 4375,3250 4425,3250 4475,3250 4575,3250 4625,3250 4675,3250 4875,3250 4925,3250 4975,3250 5025,3250 5075,3250 5125,3250 5175,3250 5225,3250 5375,3250 5425,3250 5475,3250 5525,3250 5575,3250 5625,3250 5675,3250 5725,3250 5775,3250 5825,3250 5875,3250 5925,3250 5975,3250 6025,3250 6075,3250 6125,3250 6175,3250 6225,3250 3350,3300 3400,3300 3450,3300 3750,3300 3800,3300 3850,3300 3900,3300 3950,3300 4000,3300 4050,3300 4100,3300 4150,3300 4250,3300 4300,3300 4350,3300 4400,3300 4450,3300 4550,3300 4600,3300 4650,3300 4750,3300 4850,3300 4900,3300 4950,3300 5000,3300 5050,3300 5100,3300 5150,3300 5200,3300 5250,3300 5300,3300 5350,3300 5400,3300 5450,3300 5500,3300 5550,3300 5600,3300 5650,3300 5700,3300 5750,3300 5800,3300 5850,3300 5900,3300 5950,3300 6000,3300 6050,3300 6100,3300 6150,3300 6200,3300 6250,3300 3375,3350 3425,3350 3475,3350 3675,3350 3725,3350 3775,3350 3825,3350 3875,3350 3925,3350 3975,3350 4025,3350 4075,3350 4125,3350 4225,3350 4275,3350 4325,3350 4375,3350 4425,3350 4575,3350 4625,3350 4875,3350 4925,3350 4975,3350 5025,3350 5075,3350 5125,3350 5175,3350 5225,3350 5275,3350 5825,3350 5875,3350 5925,3350 5975,3350 6125,3350 3350,3400 3400,3400 3450,3400 3700,3400 3750,3400 3800,3400 3850,3400 3900,3400 3950,3400 4000,3400 4050,3400 4100,3400 5850,3400 5900,3400 5950,3400 3375,3450 3425,3450 3625,3450 3725,3450 3775,3450 3825,3450 3875,3450 3925,3450 3975,3450 4025,3450 4075,3450 4125,3450 4425,3450 5375,3450 5425,3450 5725,3450 5775,3450 5925,3450 5975,3450 6175,3450 6225,3450 3350,3500 3400,3500 3800,3500 3850,3500 3900,3500 3950,3500 4000,3500 4050,3500 4100,3500 4450,3500 4500,3500 4550,3500 4600,3500 4650,3500 4700,3500 4750,3500 4800,3500 4850,3500 4900,3500 4950,3500 5000,3500 5050,3500 5100,3500 5150,3500 5200,3500 5250,3500 5900,3500 6200,3500 6250,3500 3375,3550 3425,3550 3725,3550 4025,3550 4075,3550 4125,3550 4225,3550 4275,3550 4325,3550 4425,3550 4475,3550 4525,3550 4575,3550 4625,3550 4675,3550 4725,3550 4775,3550 4825,3550 4875,3550 4925,3550 4975,3550 5025,3550 5075,3550 5125,3550 6175,3550 6225,3550 3350,3600 3400,3600 3450,3600 4050,3600 4100,3600 4450,3600 4500,3600 4550,3600 4600,3600 4650,3600 4700,3600 4750,3600 4800,3600 4850,3600 4900,3600 4950,3600 5000,3600 5050,3600 5100,3600 5900,3600 6200,3600 6250,3600 3375,3650 3425,3650 3575,3650 3625,3650 3675,3650 4075,3650 4125,3650 4175,3650 4225,3650 4275,3650 4325,3650 4375,3650 4425,3650 4475,3650 4525,3650 4575,3650 4625,3650 4675,3650 4725,3650 4775,3650 4825,3650 4875,3650 4925,3650 4975,3650 5025,3650 5075,3650 5125,3650 5175,3650 5225,3650 6175,3650 6225,3650 3350,3700 3550,3700 3600,3700 3950,3700 4000,3700 4050,3700 4100,3700 4150,3700 4200,3700 4250,3700 4300,3700 4350,3700 4400,3700 4450,3700 4500,3700 4550,3700 4600,3700 4650,3700 4700,3700 4750,3700 4800,3700 4850,3700 4900,3700 4950,3700 5000,3700 5050,3700 5100,3700 5300,3700 5350,3700 5400,3700 5450,3700 5550,3700 5600,3700 5900,3700 3375,3750 3525,3750 3575,3750 3775,3750 3975,3750 4025,3750 4075,3750 4125,3750 4175,3750 4225,3750 4275,3750 4325,3750 4375,3750 4425,3750 4475,3750 4525,3750 4575,3750 4625,3750 4675,3750 4725,3750 4775,3750 4825,3750 4875,3750 4925,3750 4975,3750 5025,3750 5075,3750 5125,3750 5575,3750 5625,3750 5825,3750 5875,3750 5925,3750 5975,3750 3350,3800 3400,3800 3550,3800 3600,3800 3950,3800 4000,3800 4050,3800 4100,3800 4150,3800 4200,3800 4250,3800 4300,3800 4350,3800 4400,3800 4450,3800 4500,3800 4550,3800 4600,3800 4650,3800 4700,3800 4750,3800 4800,3800 4850,3800 4900,3800 4950,3800 5000,3800 5050,3800 5100,3800 5600,3800 5650,3800 5700,3800 5750,3800 5900,3800 6150,3800 6200,3800 6250,3800 3375,3850 3775,3850 5225,3850 5275,3850 5325,3850 5575,3850 5625,3850 5675,3850 5725,3850 6125,3850 6175,3850 6225,3850 3350,3900 3550,3900 3600,3900 3950,3900 4000,3900 4050,3900 4100,3900 4150,3900 4200,3900 4250,3900 4300,3900 4350,3900 4400,3900 4450,3900 4500,3900 4550,3900 4600,3900 4650,3900 4700,3900 4750,3900 4800,3900 4850,3900 4900,3900 4950,3900 5000,3900 5050,3900 5100,3900 5150,3900 5200,3900 5250,3900 5300,3900 5350,3900 5600,3900 5650,3900 5700,3900 5750,3900 5800,3900 5850,3900 5900,3900 5950,3900 6000,3900 6050,3900 6100,3900 6150,3900 6200,3900 6250,3900
"Infrared ray": LED3.2 U1.34 U8.3 | length 1494.8
  Top Layer w10: v2(4185,3420) 4183.07,3418.07 LED3.2 4183.07,3136.93 4285,3035 4875,3035 4915,3075 U1.34
  Bottom Layer w10: v2(4185,3420) 4305,3420 4390,3505 U8.3
M1+: J1.1 U2.4 | length 262.8
  Top Layer w30: J1.1 4360,1530 4415,1585 U2.4
M1-: J1.2 U2.5 | length 262.8
  Top Layer w30: J1.2 4465.43,1445.43 4465.43,1520.43 4515,1570 U2.5
M2+: J2.1 U2.7 | length 230.7
  Top Layer w30: U2.7 4715,1590 4765,1540 J2.1
M2-: J2.2 U2.6 | length 230.7
  Top Layer w30: U2.6 4615,1531.06 4665,1481.06 J2.2
NetC1_2: C1.2 C2.2 R1.2 R3.1 R4.1 U4.4 U4.8 | length 1190.4
  Top Layer w30: U4.4 5306.89,3413.11 5350,3370 5760,3370 5839.31,3449.31 R4.1 5839.31,3667.53 R1.2 5755,3670 5681.91,3670 5677.54,3665.63 5675,3665.63 5673.21,3663.84 5623.84,3663.84 5598.98,3638.98 5546.3,3638.98 U4.8
NetD1_2: D1.2 USB1.A12 USB1.B12 | length 624
  Top Layer w30: D1.2 6065.05,3819.95 6130,3755 6130,3705 6115,3690 6115,3643.65 ; USB1.B12 6097.43,3448.62 6115,3466.2 6115,3643.65 ; USB1.A12 6097.43,3661.22 6115,3643.65
NetD2_2: D2.2 L1.1 U5.1 | length 416.8
  Top Layer w30: D2.2 3669.08,3858.23 L1.1 3685.3,3709.7 3708.55,3686.45 U5.1
NetLED1_1: LED1.1 R3.2 | length 68.1
  Top Layer w10: LED1.1 R3.2
NetLED1_2: LED1.2 U4.7 | length 102.2
  Top Layer w10: U4.7 5543.5,3585.39 5644.61,3585.39 LED1.2
NetLED2_1: LED2.1 R4.2 | length 68.1
  Top Layer w10: LED2.1 R4.2
NetLED2_2: LED2.2 U4.6 | length 108.4
  Top Layer w10: U4.6 5589.21,3535.79 5605,3520 LED2.2
NetLED3_1: LED3.1 R7.1 | length 70.3
  Top Layer w10: LED3.1 R7.1
NetR2_2: R2.2 U4.2 | length 87.6
  Top Layer w10: R2.2 5220.44,3585.79 U4.2
NetR5_2: R5.2 R6.1 U5.3 | length 155.7
  Top Layer w30: R5.2 3579.83,3594.83 3649.83,3594.83 R6.1 3709.59,3594.66 3726.58,3611.64 U5.3
OLED_SCL: U1.16 U3.3 | length 246.4
  Top Layer w10: U3.3 U1.16
OLED_SDA: U1.17 U3.4 | length 246.4
  Top Layer w10: U3.4 U1.17
PWMA: U1.25 U2.16 | length 2414.1
  Top Layer w10: U2.16 4115,2585 4210,2680 5695,2680 5815,2800 U1.25
PWMB: U1.26 U2.10 | length 1853.4
  Bottom Layer w10: U2.10 4663.46,2371.54 4663.46,2618.46 4695,2650 5645,2650 5715,2720 U1.26
RX: U1.7 排针1.2 | length 474.5
  Top Layer w10: U1.7 4915,2360 5060,2215 排针1.2
Trig: U1.29 排针4.3 | length 2339.9
  Bottom Layer w10: 排针4.3 5150,2900 5263.46,3013.46 5263.46,3198.46 5290,3225 5350,3225 U1.29
TX: U1.6 排针1.3 | length 583.7
  Top Layer w10: U1.6 4815,2415 5115,2115 排针1.3
VBAT+: C3.1 C4.1 C7.1 C8.1 J3.1 L1.2 U4.5 U5.4 U5.5 | length 2683.4
  Top Layer w30: U5.4 U5.5 3899.74,3649.05 3900.67,3649.98 3901.34,3649.98 3902.27,3649.05 3905,3651.77 3905,3738.53 3842.77,3800.76 L1.2 5172.43,3842.02 5229.37,3785.08 C4.1@5229.37,3785 ; C7.1@3905,3649.05 3984.05,3649.05 C8.1@3985,3650 ; C3.1@5232.22,3703.75 5230.79,3705.18 5230.79,3783.58 C4.1@5229.37,3785 ; J3.1 5500,3802.57 5482.43,3785 C4.1@5229.37,3785
  Bottom Layer w30: J3.1 5500,3475 v1(5520,3455) v1(5520,3425)
  other v1: 5550,3425 5580,3425 5610,3425 5550,3455 5580,3455 5610,3455
VBUS: R1.1 USB1.A9 USB1.B9 | length 340.2
  Top Layer w30: R1.1 5958.22,3631.78 ; USB1.B9 5984.13,3495.87 5958.22,3521.78 5958.22,3631.78 ; USB1.A9 6043.93,3615.2 5974.8,3615.2 5958.22,3631.78
VCC: C5.1 C6.1 C9.2 C14.2 D2.1 E1.1 E3.1 R5.1 U6.3 U7.3 排针3.1 | length 3008.1
  Top Layer w30: v1(3370,1605) v1(3400,1605) 3425.69,1605 3427.13,1606.44 3450.75,1606.44 3454.45,1610.14 U7.3 3454.45,1722.54 3474.37,1742.46 3474.37,1745 3474.37,1747.54 3471.18,1750.72 E3.1 3471.18,2976.87 3594.45,3100.14 U6.3 3592.4,3125.81 C9.2@3592.4,3215 ; D2.1 3520.34,3651.43 R5.1 3520.34,3550.34 3490,3520 3490,3440 3490,3439.92 3563.39,3366.53 3563.39,3309.61 3572.99,3300 E1.1 3583.82,3237.26 C9.2@3599.24,3221.84
  Bottom Layer w30: v1(3370,1605) v1(3400,1605) 3940,1605 排针3.1
VIN: U2.1 排针2.1 排针2.2 | length 250
  Top Layer w30: 排针2.2 排针2.1 U2.1
pads on no net: U1.5 U1.8 U1.9 U1.10 U1.11 U1.12 U1.13 U1.14 U1.15 U1.18 U1.21 U1.22 U1.23 U1.24 U1.27 U1.28 U1.31 U1.32 U1.33 U1.37 U4.9 U5.6 U9.5 U9.6 U9.7 U9.8 USB1.7 USB1.A5 USB1.B5

## Polygon pours and split planes (outlines as drawn)
GND on Top Layer "GND_L01_P002" (solid, remove dead copper, pour order 2): 3295,1340 3295,3970 6310,3970 6310,2430 6310,1340
VBAT+ on Top Layer "VBAT+_L01_P000" (solid, remove dead copper, pour order 0): 5610,3500 5655,3455 5655,3400 5650,3395 5510,3395 5500,3405 5500,3490 5510,3500
GND on Bottom Layer "GND_L02_P005" (solid, remove dead copper, pour order 5): 3295,1340 6310,1340 6310,2430 6310,3970 3295,3970
VBAT+ on Bottom Layer "VBAT+_L02_P003" (solid, remove dead copper, pour order 3): 5580,3500 5610,3470 5645,3470 5660,3455 5660,3400 5650,3390 5500,3390 5480,3410 5480,3480 5500,3500

## Silkscreen, mask and mechanical layers (free items; w line width, h text height)
Mechanical 1:
  the board outline again, w10

## Text inside footprints (layer, text, board x,y; h text height)
U3: Top Overlay "D" at 5895,2223.03 h60; Top Overlay "C" at 5795,2223.66 h60; Top Overlay "V" at 5695.03,2223.03 h60; Top Overlay "G" at 5595,2223.66 h60